# Altium PCB PCB1.PcbDoc
Units mm, origin at the board's own origin, x right, y up, seen from the top; angles counter-clockwise.
Board outline 70 x 90 mm, 2 copper layers (Top Layer, Bottom Layer); 16 components, 62 nets, 154 pads, 270 vias.
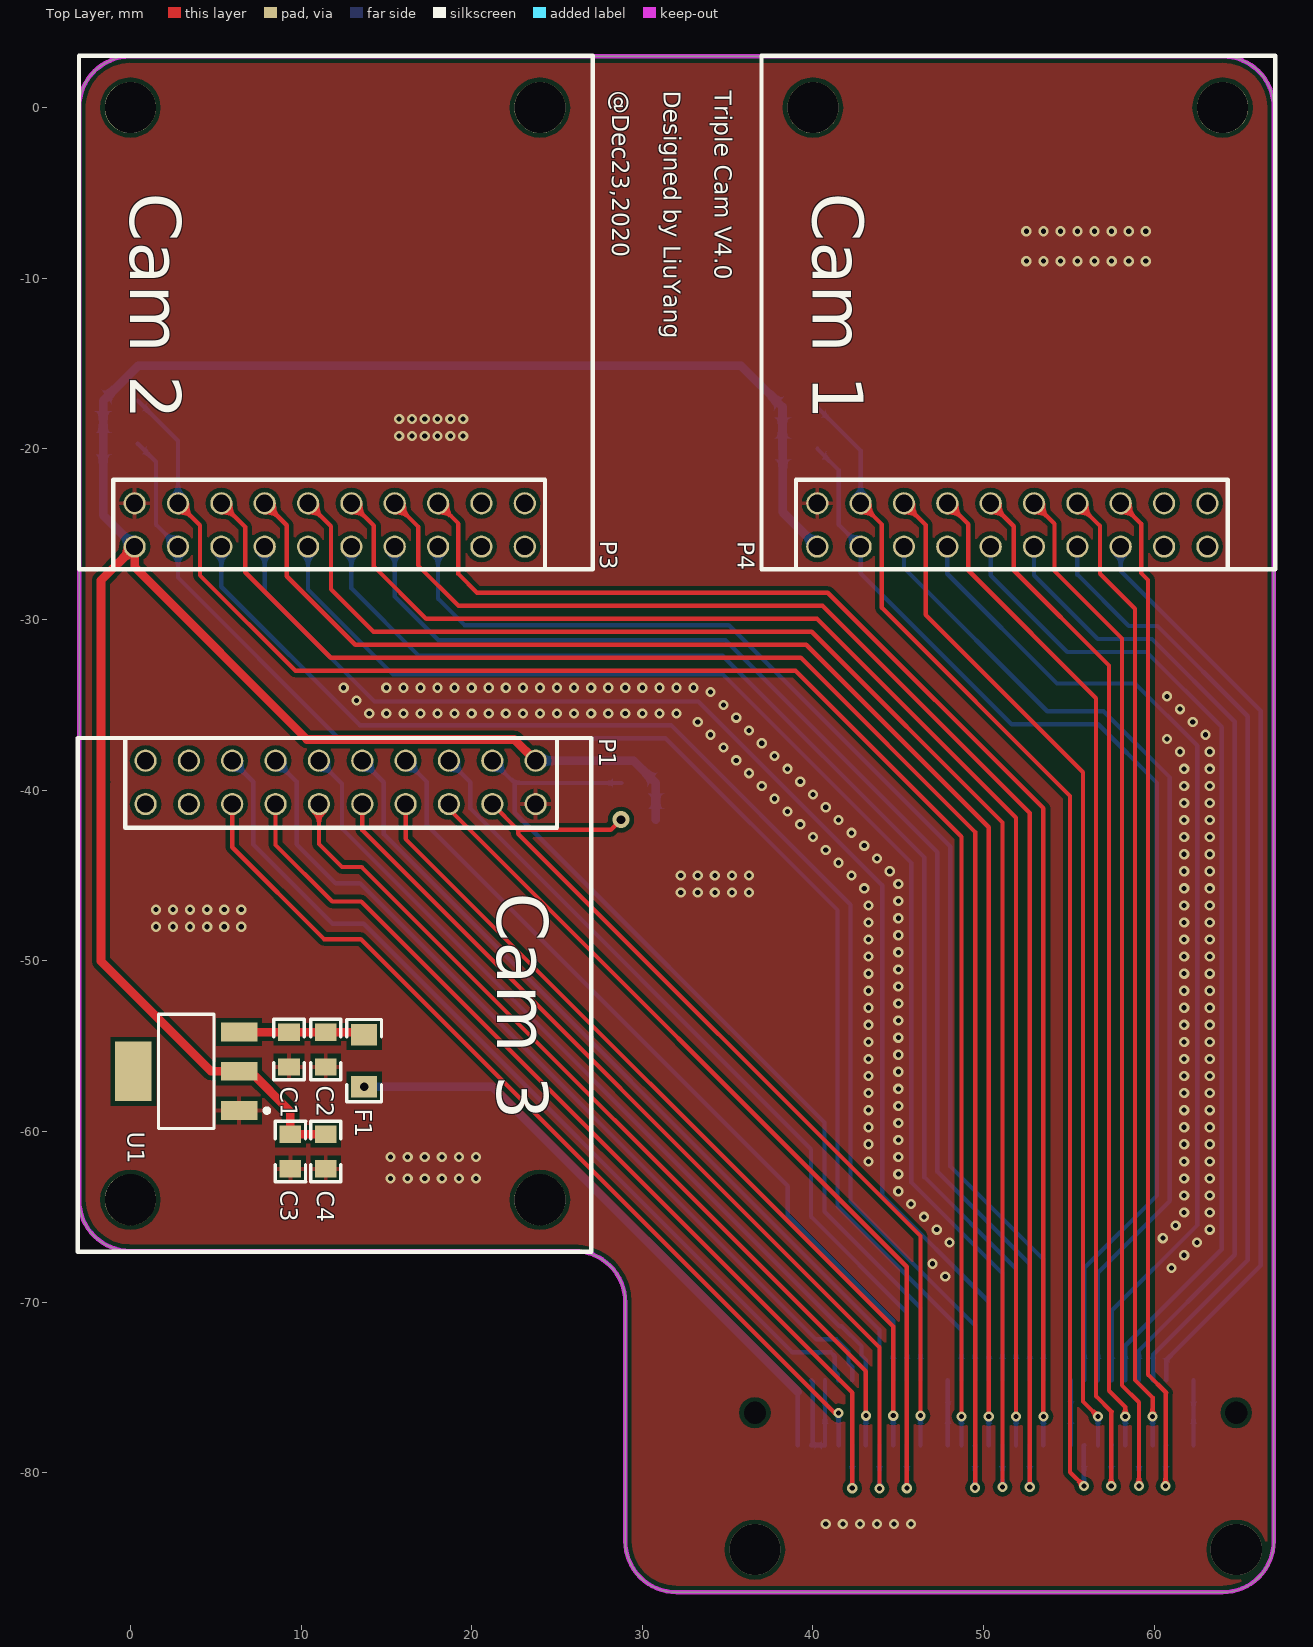
[diagram p0: Top Layer view]
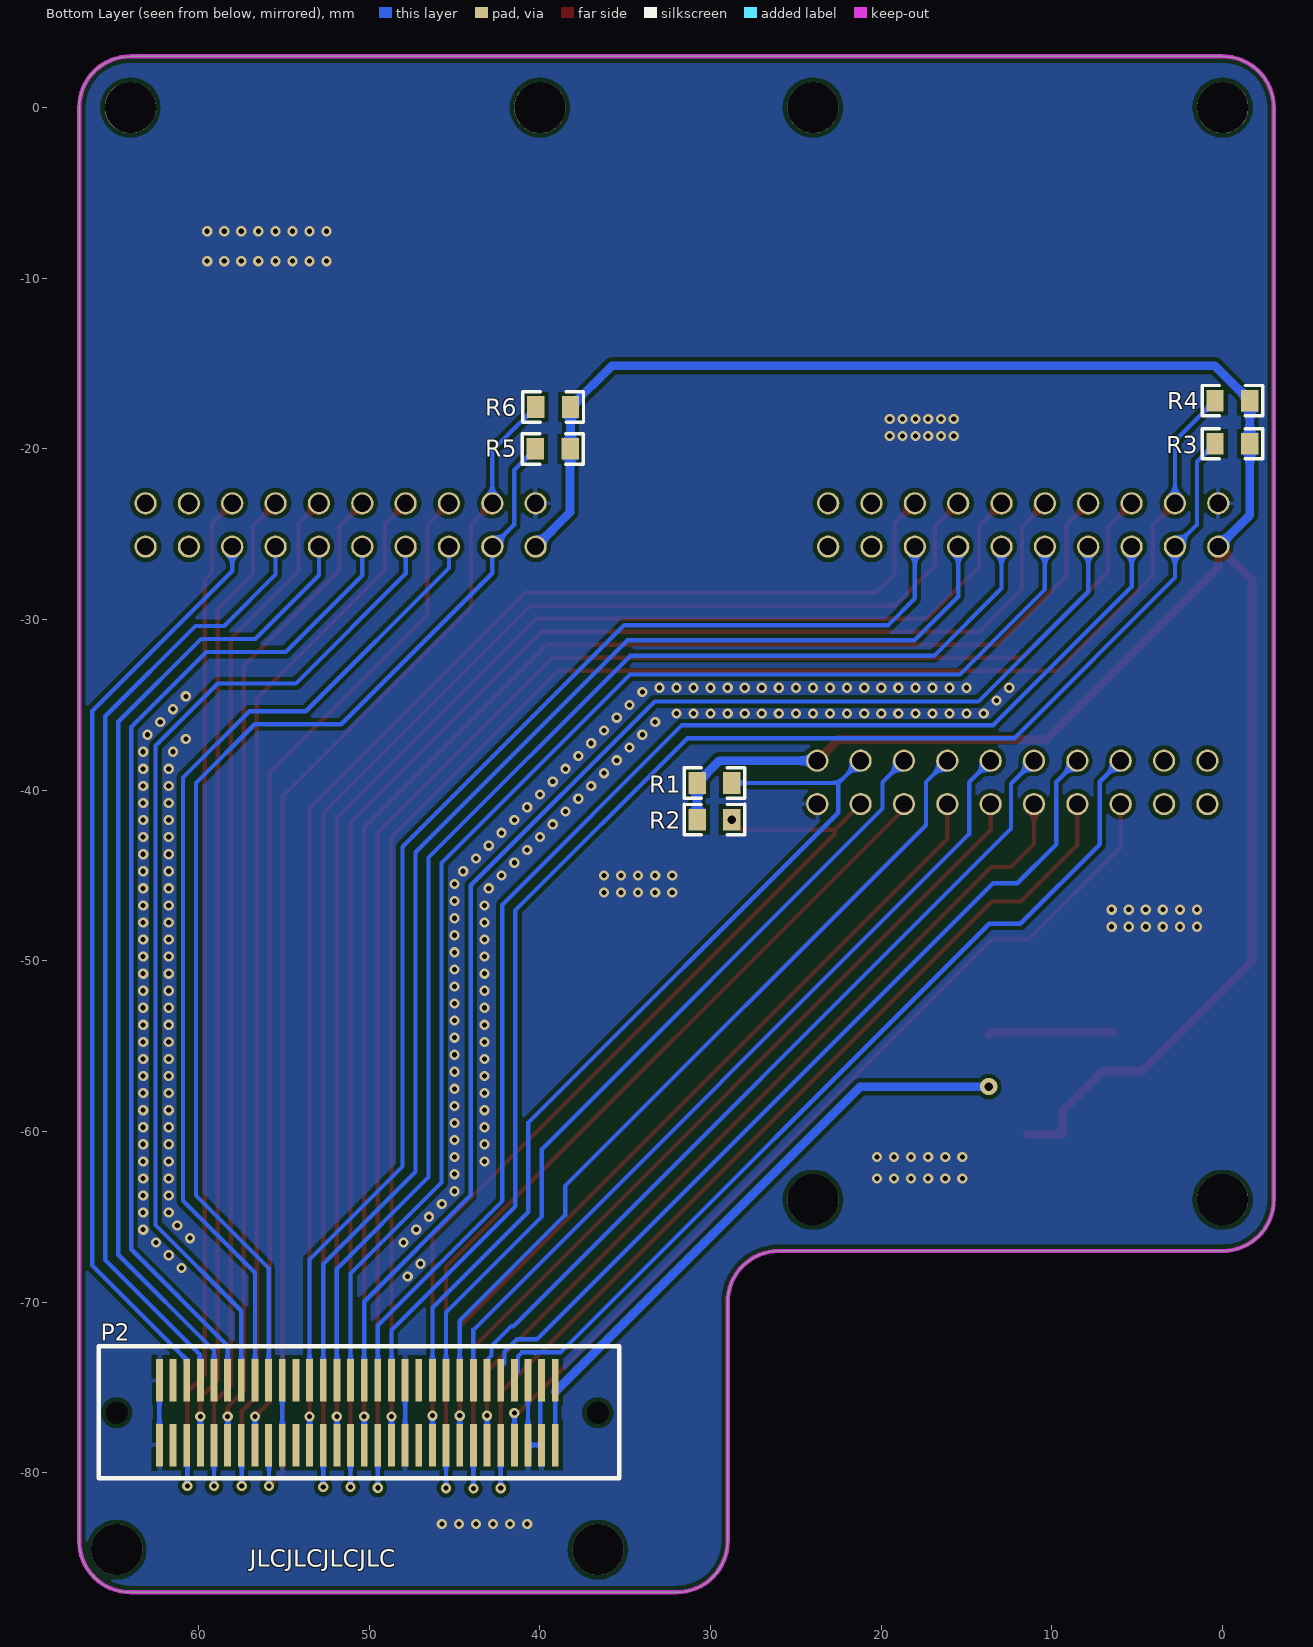
[diagram p1: Bottom Layer view, seen from below]
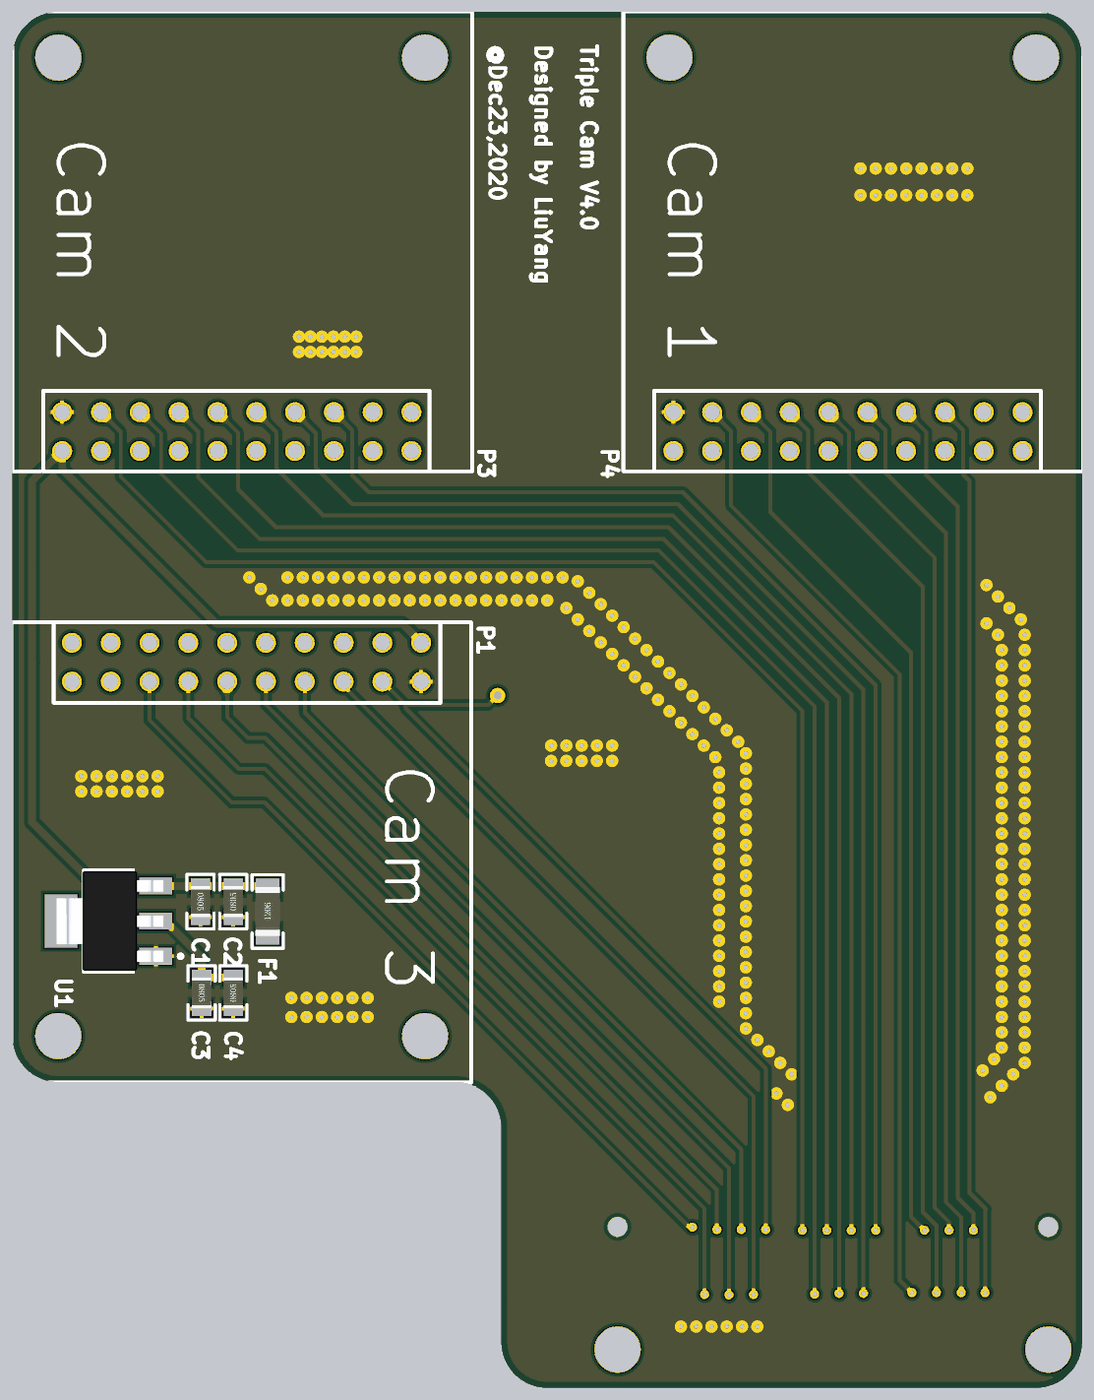
[diagram p2: 3D render of the assembled board from above, using the file's embedded part models]
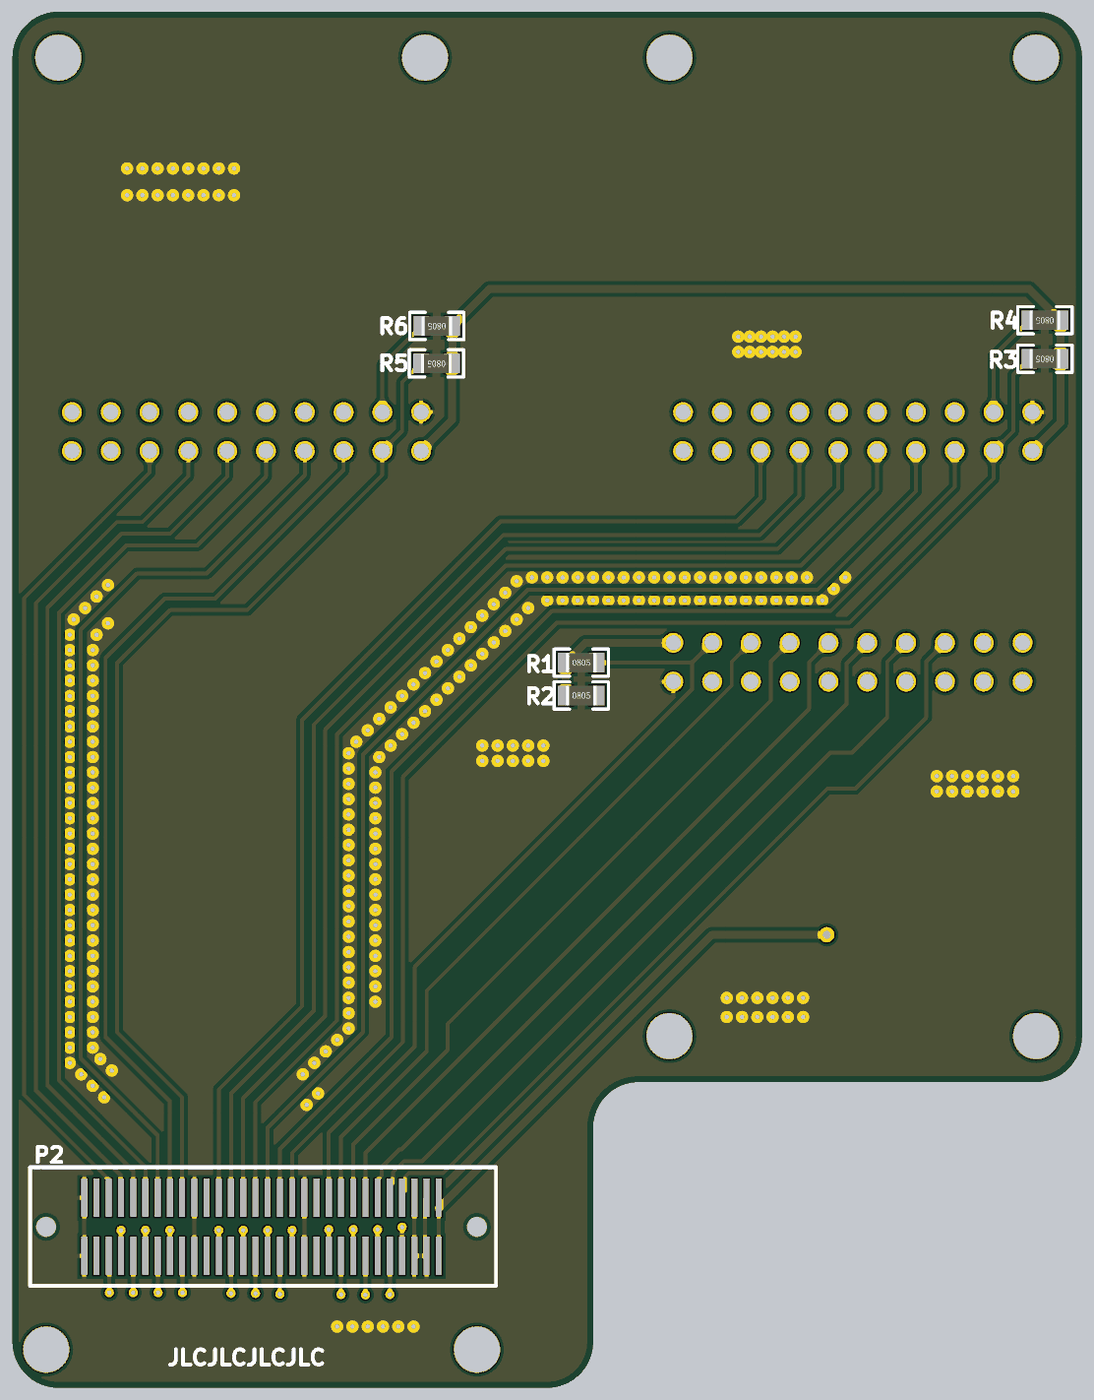
[diagram p3: 3D render of the assembled board from below, using the file's embedded part models]

## Layer stack, top to bottom
Top Solder: solder mask 0.0102, Solder Resist, Dk 3.5
Top Layer: signal copper 0.0356
Dielectric 1: dielectric 0.32, FR-4, Dk 4.8
Bottom Layer: signal copper 0.0356
Bottom Solder: solder mask 0.0102, Solder Resist, Dk 3.5

## Board outline
0,-67 cw(c0,-64) -3,-64 -3,0 cw(c0,0) 0,3 64,3 cw(c64,0) 67,0 67,-84 cw(c64,-84) 64,-87 32,-87 cw(c32,-84) 29,-84 29,-70 ccw(c26,-70) 26,-67

## Design rules (kind name [scope] priority, off if disabled: settings)
Clearance [All] p1: gap=0.254 except(0.508: Track-Track)
PolygonConnect [All] p1: connectstyle=Relief reliefconductorwidth=0.254 reliefentries=4 polygonreliefangle="90 Angle" airgapwidth=0.254
RoutingVias [All] p1: holewidth=0.3 width=0.6 viastyle="Through Hole" minholewidth=0.3 minwidth=0.6 maxholewidth=6 maxwidth=10
SolderMaskExpansion [All] p1: expansion=0.102
Width [All] p1: maxlimit=0.508 minlimit=0.127 preferedwidth=0.254
30 further rules are at their usual default settings.

## Components (designator, comment, footprint, x,y, rotation, side; value= is the part's Value field where it differs from the comment)
C1 "Cap2" R0805 9.3,-55.2 r270 top
C2 "Cap" R0805 11.45,-55.2 r90 top
C3 "Cap2" R0805 9.375,-61.175 r270 top
C4 "Cap" R0805 11.45,-61.175 r90 top
F1 "Fuse 1" R1206 13.7,-55.849 r90 top
P1 "Header 10X2" PCBComponent_1 27,-67 r180 top locked
P2 "Header 30X2" BTBCON_0.8mm_60P 39.1,-74.575 r270 bottom locked
P3 "Header 10X2" PCBComponent_1 -3,3 r0 top locked
P4 "Header 10X2" PCBComponent_1 37,3 r0 top locked
R1 "Res1" R0805 29.775,-39.575 r180 bottom
R2 "Res1" R0805 29.775,-41.725 r180 bottom
R3 "Res1" R0805 -0.575,-19.7 r0 bottom
R4 "Res1" R0805 -0.575,-17.175 r0 bottom
R5 "Res1" R0805 39.25,-20 r0 bottom
R6 "Res1" R0805 39.225,-17.55 r0 bottom
U1 "AMS1117-33" "SOT-223   AMS1117" 3.275,-56.475 r90 top

## Footprints (in the part's own frame and the unit in brackets; to place one, negate y for a bottom-side part, rotate by r counter-clockwise, add the part's x,y. Pads: shape width x height; smd on the part's side, far side on the other; paste and mask are expansions set on the pad)
BTBCON_0.8mm_60P [mm]
  rect 2.5x0.4 smd: 1(0,0) 2(3.8,0) 3(0,-0.8) 4(3.8,-0.8) 5(0,-1.6) 6(3.8,-1.6) 7(0,-2.4) 8(3.8,-2.4) 9(0,-3.2) 10(3.8,-3.2) 11(0,-4) 12(3.8,-4) 13(0,-4.8) 14(3.8,-4.8) 15(0,-5.6) 16(3.8,-5.6) 17(0,-6.4) 18(3.8,-6.4) 19(0,-7.2) 20(3.8,-7.2) 21(0,-8) 22(3.8,-8) 23(0,-8.8) 24(3.8,-8.8) 25(0,-9.6) 26(3.8,-9.6) 27(0,-10.4) 28(3.8,-10.4) 29(0,-11.2) 30(3.8,-11.2) 31(0,-12) 32(3.8,-12) 33(0,-12.8) 34(3.8,-12.8) 35(0,-13.6) 36(3.8,-13.6) 37(0,-14.4) 38(3.8,-14.4) 39(0,-15.2) 40(3.8,-15.2) 41(0,-16) 42(3.8,-16) 43(0,-16.8) 44(3.8,-16.8) 45(0,-17.6) 46(3.8,-17.6) 47(0,-18.4) 48(3.8,-18.4) 49(0,-19.2) 50(3.8,-19.2) 51(0,-20) 52(3.8,-20) 53(0,-20.8) 54(3.8,-20.8) 55(0,-21.6) 56(3.8,-21.6) 57(0,-22.4) 58(3.8,-22.4) 59(0,-23.2) 60(3.8,-23.2)
  round 1 hole 1.3: 61(1.9,2.5) 62(1.9,-25.7)
  silkscreen extent -2,-26.75 5.75,3.75
PCBComponent_1 [mm]
  round 3 hole 3: 0(3,-3) 0(27,-3)
  round 1.3 hole 1: 1(3.251,-28.727) 2(3.251,-26.187) 3(5.791,-28.727) 4(5.791,-26.187) 5(8.331,-28.727) 6(8.331,-26.187) 7(10.871,-28.727) 8(10.871,-26.187) 9(13.411,-28.727) 10(13.411,-26.187) 11(15.951,-28.727) 12(15.951,-26.187) 13(18.491,-28.727) 14(18.491,-26.187) 15(21.031,-28.727) 16(21.031,-26.187) 17(23.571,-28.727) 18(23.571,-26.187) 19(26.111,-28.727) 20(26.111,-26.187)
  silkscreen extent -0.01,-30.06 30.09,0.04
R0805 [mil]
  rect 40x50 smd: 1(-40,0) 2(40,0)
  silkscreen extent -70,-35 70,35, body extent -39,-25 39,25, height 22
R1206 [mil]
  rect 50x60 smd: 1(-60,0) 2(60,0)
  silkscreen extent -95,-40 95,40, body extent -63,-31 63,31, height 24
"SOT-223   AMS1117" [mm] "SOT-223/SC-73; 4 Leads; Body 6.7 x 7.3 mm, inc. leads (LxW max)"
  rect 1.1x2.15 smd: 1(-2.3,-3.1) 2(0,-3.1) 3(2.3,-3.1)
  rect 3.5x2.15 smd: 4(0,3.1)
  silkscreen extent -3.35,-4.85 3.35,1.63, body extent -3.25,-3.58 3.25,3.38, height 1.65

## Part data
C1 C2 C3 C4: "Capacitor"
F1: "Fuse"
P1 P3 P4: "Header, 10-Pin, Dual row"
P2: "Header, 30-Pin, Dual row"
R1 R2 R3 R4 R5 R6: "Resistor"
U1: library part "Volt Reg", "Voltage Regulator"

## Via types
v1: diameter 0.6, hole 0.3, Top Layer to Bottom Layer, 266 vias
v2: diameter 3, hole 3, Top Layer to Bottom Layer, 2 vias
v3: diameter 1, hole 0.5, Top Layer to Bottom Layer, 2 vias

## Nets (pads, with @x,y where several pads share a name; then routed paths per layer and width w, separated by ;. In a path a pad name is that pad's centre, name@x,y a point inside that pad or via, vN(x,y) a via of type N, cw(c..) or ccw(c..) an arc to the next point about the centre after c; other vN are vias at no path point)
3V3: C3.1 C4.2 P1.1 P3.1 P4.1 R1.1 R2.1 R3.1 R4.1 R5.1 R6.1 U1.2 | length 142.4
  Top Layer w0.508: -1.7,-39.525 -1.725,-39.5 ; C4.2 C3.1 9.375,-58.824 7.026,-56.475 U1.2 4.725,-56.475 -1.725,-50.025 -1.725,-39.5 ; P1.1 22.501,-37.025 10.35,-37.025 0.251,-26.926 P3.1 -1.725,-27.704 -1.725,-39.5
  Bottom Layer w0.508: P3.1 -1.591,-23.885 R3.1 R4.1 0.459,-15.125 35.784,-15.125 R6.1 38.209,-19.975 R5.1 38.234,-23.71 P4.1 ; P1.1 29.489,-38.273 R1.1 R2.1
5V: F1.1 P2.1 P2.2 | length 35.9
  Bottom Layer w0.254: P2.2 P2.1@39.1,-75.25
  Bottom Layer w0.508: v3(13.7,-57.373) 21.223,-57.373 P2.1@39.1,-75.25
D0_1: P1.16 P2.8 | length 53.7
  Top Layer w0.254: P1.16 5.969,-43.344 11.35,-48.725 13.5,-48.725 41.275,-76.5 v1(41.5,-76.5)
  Bottom Layer w0.254: P2.8 v1(41.5,-76.5)
D0_2: P2.38 P3.16 | length 81.9
  Top Layer w0.254: P3.16 19.222,-24.379 19.222,-27.335 20.315,-28.428 40.869,-28.428 53.5,-41.059 v1(53.5,-76.698)
  Bottom Layer w0.254: P2.38 v1(53.5,-76.698)
D0_3: P2.56 P4.16 | length 61.1
  Top Layer w0.254: P4.16 59.227,-24.384 59.227,-27.277 59.634,-27.684 59.634,-74.244 60.7,-75.31 60.662,-75.348 v1(60.662,-80.775)
  Bottom Layer w0.254: v1(60.662,-80.775) 60.662,-78.413 P2.56
D1_1: P1.15 P2.7 | length 53.5
  Bottom Layer w0.254: P1.15 7.2,-39.504 7.2,-43.175 11.85,-47.825 13.675,-47.825 38.794,-72.944 40.258,-72.944 40.3,-72.986 40.342,-72.944 41.058,-72.944 41.281,-73.167 41.281,-74.078 41.462,-74.259 41.462,-74.575 P2.7
D1_2: P2.37 P3.15 | length 72.6
  Bottom Layer w0.254: P3.15 18.031,-28.775 19.583,-30.328 35.06,-30.328 48.05,-43.317 48.05,-62.042 53.5,-67.492 P2.37
D1_3: P2.55 P4.15 | length 54.5
  Bottom Layer w0.254: P4.15 58.031,-27.148 66.238,-35.355 66.238,-67.848 60.7,-73.386 P2.55
D2_1: P1.14 P2.10 | length 57.6
  Top Layer w0.254: P1.14 8.509,-43.209 11.825,-46.525 13.525,-46.525 42.3,-75.3 v1(42.3,-80.9)
  Bottom Layer w0.254: v1(42.3,-80.9) P2.10
D2_2: P2.36 P3.14 | length 88.1
  Top Layer w0.254: P3.14 16.86,-24.556 16.86,-26.827 19.223,-29.19 40.553,-29.19 52.7,-41.337 v1(52.7,-80.825) v1@52.65,-80.875
  Bottom Layer w0.254: v1@52.65,-80.875 v1(52.7,-80.825) P2.36
D2_3: P2.54 P4.14 | length 57
  Top Layer w0.254: P4.14 56.814,-24.511 56.814,-27.314 58.872,-29.372 58.872,-74.559 59.9,-75.587 v1(59.9,-76.698)
  Bottom Layer w0.254: P2.54 v1(59.9,-76.698)
D3_1: P1.13 P2.9 | length 51.8
  Bottom Layer w0.254: P1.13 9.75,-39.514 9.75,-43.175 12.025,-45.45 13.45,-45.45 40.182,-72.182 41.373,-72.182 42.081,-72.89 42.081,-73.584 42.3,-73.803 P2.9
D3_2: P2.35 P3.13 | length 74.1
  Bottom Layer w0.254: P3.13 15.491,-28.648 18.059,-31.217 34.872,-31.217 47.288,-43.633 47.288,-62.358 52.7,-67.77 P2.35
D3_3: P2.53 P4.13 | length 56.3
  Bottom Layer w0.254: P4.13 55.491,-27.366 58.501,-30.376 60.181,-30.376 65.476,-35.671 65.476,-67.533 59.938,-73.071 59.938,-74.537 P2.53
D4_1: P1.12 P2.12 | length 51.5
  Top Layer w0.254: P1.12 11.049,-43.149 12.4,-44.5 13.55,-44.5 43.1,-74.05 v1(43.1,-76.65)
  Bottom Layer w0.254: P2.12 v1(43.1,-76.65)
D4_2: P2.34 P3.12 | length 84.7
  Top Layer w0.254: P3.12 14.269,-24.506 14.269,-26.893 17.328,-29.952 40.238,-29.952 51.9,-41.614 v1(51.9,-76.698)
  Bottom Layer w0.254: P2.34 v1(51.9,-76.698)
D4_3: P2.52 P4.12 | length 62.5
  Top Layer w0.254: P4.12 54.147,-24.384 54.147,-27.147 58.11,-31.11 58.11,-74.875 59.1,-75.865 v1(59.1,-80.775)
  Bottom Layer w0.254: v1(59.1,-80.775) P2.52
D5_1: P1.11 P2.11 | length 49.6
  Bottom Layer w0.254: P1.11 12.4,-39.624 12.4,-42.25 41.57,-71.42 41.689,-71.42 42.843,-72.574 42.843,-73.129 43.1,-73.386 P2.11
D5_2: P2.33 P3.11 | length 75.4
  Bottom Layer w0.254: P3.11 12.951,-28.166 16.916,-32.131 34.709,-32.131 46.526,-43.948 46.526,-62.673 51.9,-68.047 P2.33
D5_3: P2.51 P4.11 | length 57.9
  Bottom Layer w0.254: P4.11 52.951,-27.401 56.688,-31.138 59.866,-31.138 64.714,-35.986 64.714,-67.217 59.1,-72.831 P2.51
D6_1: P1.10 P2.14 | length 55.2
  Top Layer w0.254: P1.10 13.589,-42.339 43.9,-72.65 v1(43.9,-80.925)
  Bottom Layer w0.254: v1(43.9,-80.925) P2.14
D6_2: P2.32 P3.10 | length 92
  Top Layer w0.254: P3.10 11.755,-24.531 11.755,-28.224 14.244,-30.714 39.922,-30.714 51.1,-41.892 v1(51.1,-80.825)
  Bottom Layer w0.254: v1(51.1,-80.825) P2.32
D6_3: P2.50 P4.10 | length 58.5
  Top Layer w0.254: P4.10 51.76,-24.536 51.76,-27.11 57.348,-32.698 57.348,-75.191 58.3,-76.143 v1(58.3,-76.698)
  Bottom Layer w0.254: P2.50 v1(58.3,-76.698)
D7_1: P1.9 P2.13 | length 48.9
  Bottom Layer w0.254: P1.9 14.85,-39.534 14.85,-42.575 43.9,-71.625 P2.13
D7_2: P2.31 P3.9 | length 77
  Bottom Layer w0.254: P3.9 10.411,-28.242 15.392,-33.223 34.723,-33.223 45.764,-44.264 45.764,-62.989 51.1,-68.325 P2.31
D7_3: P2.49 P4.9 | length 59.5
  Bottom Layer w0.254: P4.9 50.411,-27.411 54.9,-31.9 59.55,-31.9 63.952,-36.302 63.952,-66.901 58.3,-72.553 P2.49
FREX_1: P1.19
FREX_2: P3.19
FREX_3: P4.19
GND: C1.2 C2.1 C3.2 C4.1 P1.2 P2.3 P2.4 P2.5 P2.6 P2.23 P2.24 P2.41 P2.42 P2.59 P2.60 P3.2 P4.2 U1.1 | length 19.9
  Bottom Layer w0.254: P2.3 39.989,-74.664 39.989,-78.286 P2.4 P2.6 P2.5 ; P2.24 P2.23 ; P2.42 P2.41 ; P2.60 P2.59
  other v1: 40.75,-83 41.75,-83 42.75,-83 43.75,-83 44.75,-83 45.75,-83 47.75,-68.5 61,-68 47,-67.75 61.75,-67.25 48,-66.5 62.5,-66.5 60.5,-66.25 47.25,-65.75 63.25,-65.75 61.25,-65.5 46.5,-65 61.75,-64.75 63.25,-64.75 45.75,-64.25 61.75,-63.75 63.25,-63.75 45,-63.5 15.25,-62.75 16.25,-62.75 17.25,-62.75 18.25,-62.75 19.25,-62.75 20.25,-62.75 61.75,-62.75 63.25,-62.75 45,-62.5 43.25,-61.75 61.75,-61.75 63.25,-61.75 15.25,-61.5 16.25,-61.5 17.25,-61.5 18.25,-61.5 19.25,-61.5 20.25,-61.5 45,-61.5 43.25,-60.75 61.75,-60.75 63.25,-60.75 45,-60.5 43.25,-59.75 61.75,-59.75 63.25,-59.75 45,-59.5 43.25,-58.75 61.75,-58.75 63.25,-58.75 45,-58.5 43.25,-57.75 61.75,-57.75 63.25,-57.75 45,-57.5 43.25,-56.75 61.75,-56.75 63.25,-56.75 45,-56.5 43.25,-55.75 61.75,-55.75 63.25,-55.75 45,-55.5 43.25,-54.75 61.75,-54.75 63.25,-54.75 45,-54.5 43.25,-53.75 61.75,-53.75 63.25,-53.75 45,-53.5 43.25,-52.75 61.75,-52.75 63.25,-52.75 45,-52.5 43.25,-51.75 61.75,-51.75 63.25,-51.75 45,-51.5 43.25,-50.75 61.75,-50.75 63.25,-50.75 45,-50.5 43.25,-49.75 61.75,-49.75 63.25,-49.75 45,-49.5 43.25,-48.75 61.75,-48.75 63.25,-48.75 45,-48.5 1.5,-48 2.5,-48 3.5,-48 4.5,-48 5.5,-48 6.5,-48 43.25,-47.75 61.75,-47.75 63.25,-47.75 45,-47.5 1.5,-47 2.5,-47 3.5,-47 4.5,-47 5.5,-47 6.5,-47 43.25,-46.75 61.75,-46.75 63.25,-46.75 45,-46.5 32.25,-46 33.25,-46 34.25,-46 35.25,-46 36.25,-46 43,-45.75 61.75,-45.75 63.25,-45.75 45,-45.5 32.25,-45 33.25,-45 34.25,-45 35.25,-45 36.25,-45 42.25,-45 44.5,-44.75 61.75,-44.75 63.25,-44.75 41.5,-44.25 43.75,-44 61.75,-43.75 63.25,-43.75 40.75,-43.5 43,-43.25 40,-42.75 61.75,-42.75 63.25,-42.75 42.25,-42.5 39.25,-42 41.5,-41.75 61.75,-41.75 63.25,-41.75 38.5,-41.25 40.75,-41 61.75,-40.75 63.25,-40.75 37.75,-40.5 40,-40.25 37,-39.75 61.75,-39.75 63.25,-39.75 39.25,-39.5 36.25,-39 38.5,-38.75 61.75,-38.75 63.25,-38.75 35.5,-38.25 37.75,-38 61.5,-37.75 63.25,-37.75 34.75,-37.5 37,-37.25 60.75,-37 34,-36.75 63,-36.75 36.25,-36.5 33.25,-36 62.25,-36 35.5,-35.75 14,-35.5 15,-35.5 16,-35.5 17,-35.5 18,-35.5 19,-35.5 20,-35.5 21,-35.5 22,-35.5 23,-35.5 24,-35.5 25,-35.5 26,-35.5 27,-35.5 28,-35.5 29,-35.5 30,-35.5 31,-35.5 32,-35.5 61.5,-35.25 34.75,-35 13.25,-34.75 60.75,-34.5 34,-34.25 12.5,-34 15,-34 16,-34 17,-34 18,-34 19,-34 20,-34 21,-34 22,-34 23,-34 24,-34 25,-34 26,-34 27,-34 28,-34 29,-34 30,-34 31,-34 32,-34 33,-34 15.75,-19.25 16.5,-19.25 17.25,-19.25 18,-19.25 18.75,-19.25 19.5,-19.25 15.75,-18.25 16.5,-18.25 17.25,-18.25 18,-18.25 18.75,-18.25 19.5,-18.25 52.5,-9 53.5,-9 54.5,-9 55.5,-9 56.5,-9 57.5,-9 58.5,-9 59.5,-9 52.5,-7.25 53.5,-7.25 54.5,-7.25 55.5,-7.25 56.5,-7.25 57.5,-7.25 58.5,-7.25 59.5,-7.25
HS_1: P1.6 P2.18 | length 53.7
  Top Layer w0.254: P1.6 18.669,-41.094 45.5,-67.925 v1(45.5,-80.9)
  Bottom Layer w0.254: v1(45.5,-80.9) P2.18
HS_2: P2.28 P3.6 | length 94.7
  Top Layer w0.254: P3.6 6.726,-24.582 6.726,-27.226 11.738,-32.238 39.291,-32.238 49.5,-42.447 49.5,-47.405 v1(49.5,-80.875)
  Bottom Layer w0.254: v1(49.5,-80.875) 49.5,-78.451 49.462,-78.413 P2.28
HS_3: P2.46 P4.6 | length 59.9
  Top Layer w0.254: P4.6 46.604,-24.46 46.604,-29.729 55.824,-38.949 55.824,-75.822 v1(56.7,-76.698)
  Bottom Layer w0.254: P2.46 v1(56.7,-76.698)
NetC1_1: C1.1 C2.2 F1.2 U1.3 | length 7.4
  Top Layer w0.508: U1.3 13.55,-54.175 F1.2
PCLK_1: P1.7 P2.15 | length 48.1
  Bottom Layer w0.254: P1.7 17.375,-39.519 17.375,-42.05 38.525,-63.2 38.525,-64.9 44.7,-71.075 P2.15
PCLK_2: P2.29 P3.7 | length 77.5
  Bottom Layer w0.254: P3.7 7.871,-28.369 14.308,-34.806 29.357,-34.806 29.363,-34.8 33.276,-34.8 44.05,-45.574 44.05,-63.725 50.3,-69.975 P2.29
PCLK_3: P2.47 P4.7 | length 59.7
  Bottom Layer w0.254: P4.7 47.871,-27.321 54.3,-33.75 58.875,-33.75 62.525,-37.4 62.525,-65.475 57.5,-70.5 P2.47
PWDN_1: P1.18
PWDN_2: P3.18
PWDN_3: P4.18
RST_1: P1.17
RST_2: P3.17
RST_3: P4.17
SCK_1: P1.3 P2.19 R1.2 | length 52.9
  Bottom Layer w0.254: P1.3 22.511,-39.575 ; R1.2 22.511,-39.575 ; P2.19 46.3,-70.322 40.676,-64.698 40.676,-59.476 22.525,-41.325 22.525,-39.589 22.511,-39.575
SCK_2: P2.25 P3.3 R3.2 | length 86.1
  Bottom Layer w0.254: R3.2 1.5,-20.759 1.5,-24.436 P3.3 2.791,-27.541 12.2,-36.95 31.362,-36.95 41.438,-47.026 41.438,-64.383 48.7,-71.645 P2.25
SCK_3: P2.43 P4.3 R5.2 | length 67.5
  Bottom Layer w0.254: R5.2 41.5,-21.234 41.5,-24.436 P4.3 42.791,-27.291 51.637,-36.137 56.709,-36.137 60.15,-39.578 60.15,-63.747 55.9,-67.997 P2.43
SDA_1: P1.4 P2.20 R2.2 | length 54.2
  Top Layer w0.254: P1.4 22.721,-42.325 ; v3(28.75,-41.725) 28.15,-42.325 22.721,-42.325 ; v1(46.3,-76.65) 46.3,-66.125 22.721,-42.546 22.721,-42.325
  Bottom Layer w0.254: P2.20 v1(46.3,-76.65)
SDA_2: P2.26 P3.4 R4.2 | length 98.4
  Top Layer w0.254: P3.4 4.084,-24.48 4.084,-27.412 9.672,-33 38.975,-33 48.7,-42.725 v1(48.7,-76.698)
  Bottom Layer w0.254: R4.2 2.791,-19.525 P3.4 ; P2.26 v1(48.7,-76.698)
SDA_3: P2.44 P4.4 R6.2 | length 72.1
  Top Layer w0.254: P4.4 44.038,-24.434 44.038,-29.313 55.062,-40.337 55.062,-79.962 v1(55.875,-80.775)
  Bottom Layer w0.254: R6.2 42.791,-20.1 P4.4 ; v1(55.875,-80.775) 55.875,-78.4 P2.44
STRO_1: P1.20
STRO_2: P3.20
STRO_3: P4.20
T10: P2.58
T11: P2.57
V16: P2.39
VS_1: P1.5 P2.17 | length 47.4
  Bottom Layer w0.254: P1.5 19.925,-39.529 19.925,-41.075 39.887,-61.038 39.887,-64.987 45.5,-70.6 P2.17
VS_2: P2.27 P3.5 | length 77.8
  Bottom Layer w0.254: P3.5 5.331,-28.081 13.438,-36.188 31.678,-36.188 42.2,-46.71 42.2,-64.067 49.5,-71.367 P2.27
VS_3: P2.45 P4.5 | length 59
  Bottom Layer w0.254: P4.5 45.331,-26.981 53.725,-35.375 57.025,-35.375 60.912,-39.262 60.912,-64.063 56.7,-68.275 P2.45
W16: P2.40
XCLK_1: P1.8 P2.16 | length 49.4
  Top Layer w0.254: P1.8 16.129,-42.854 44.7,-71.425 v1(44.7,-76.65)
  Bottom Layer w0.254: P2.16 v1(44.7,-76.65)
XCLK_2: P2.30 P3.8 | length 88.2
  Top Layer w0.254: P3.8 9.164,-24.48 9.164,-27.462 13.178,-31.476 39.606,-31.476 50.3,-42.17 v1(50.3,-76.698)
  Bottom Layer w0.254: P2.30 v1(50.3,-76.698)
XCLK_3: P2.48 P4.8 | length 64
  Top Layer w0.254: P4.8 49.093,-24.409 49.093,-27.118 56.586,-34.611 56.586,-75.506 57.5,-76.42 57.475,-76.445 v1(57.475,-80.775)
  Bottom Layer w0.254: v1(57.475,-80.775) 57.475,-78.4 P2.48
pads on no net: P1.0 P2.21 P2.22 P2.61 P2.62 P3.0 P4.0 U1.4
copper on no net:
  other v2: 36.6,-84.5 64.8,-84.5

## Polygon pours and split planes (outlines as drawn)
GND on Top Layer "Top Layer-No Net" (solid, remove dead copper, pour order 24): -9.325,5.8 76.75,5.8 77.375,5.175 67.325,-4.875 67.325,-92.85 30.425,-92.85 27.2,-89.625 25.275,-87.7 25.275,-71.1 -8.95,-71.1 -9.85,-72
GND on Bottom Layer "Top Layer-No Net" (solid, remove dead copper, pour order 26): -6.875,5.175 -6.6,4.9 69.9,4.9 69.9,-88.075 68.1,-89.875 25.15,-89.875 25.15,-71.625 24.125,-70.6 23.725,-70.2 -7.525,-70.2

## Keep-outs
Keep-Out Layer:
  the board outline again, w0.254

## Silkscreen, mask and mechanical layers (free items; w line width, h text height)
Top Overlay:
  text "@Dec23,2020" at 28.25,1 h1 r270
  text "Designed by LiuYang" at 31.25,1 h1 r270
  text "Triple Cam V4.0" at 34.25,1 h1 r270
  text "Cam 2" at 0,-5 h3 r270
  text "Cam 1" at 40,-5 h3 r270
  text "Cam 3" at 21.5,-46 h3 r270
Bottom Overlay:
  text "JLCJLCJLCJLC" at 57,-85.5 h1
Mechanical 1:
  the board outline again, w0.254